# Altium PCB Sheet1.PcbDoc
Units mil, origin at the board's own origin, x right, y up, seen from the top; angles counter-clockwise.
Board outline 1260 x 1260 mil, 2 copper layers (Top Layer, Bottom Layer); 21 components, 13 nets, 72 pads, 78 vias.
Unrouted connection lines stored in the file: 24.
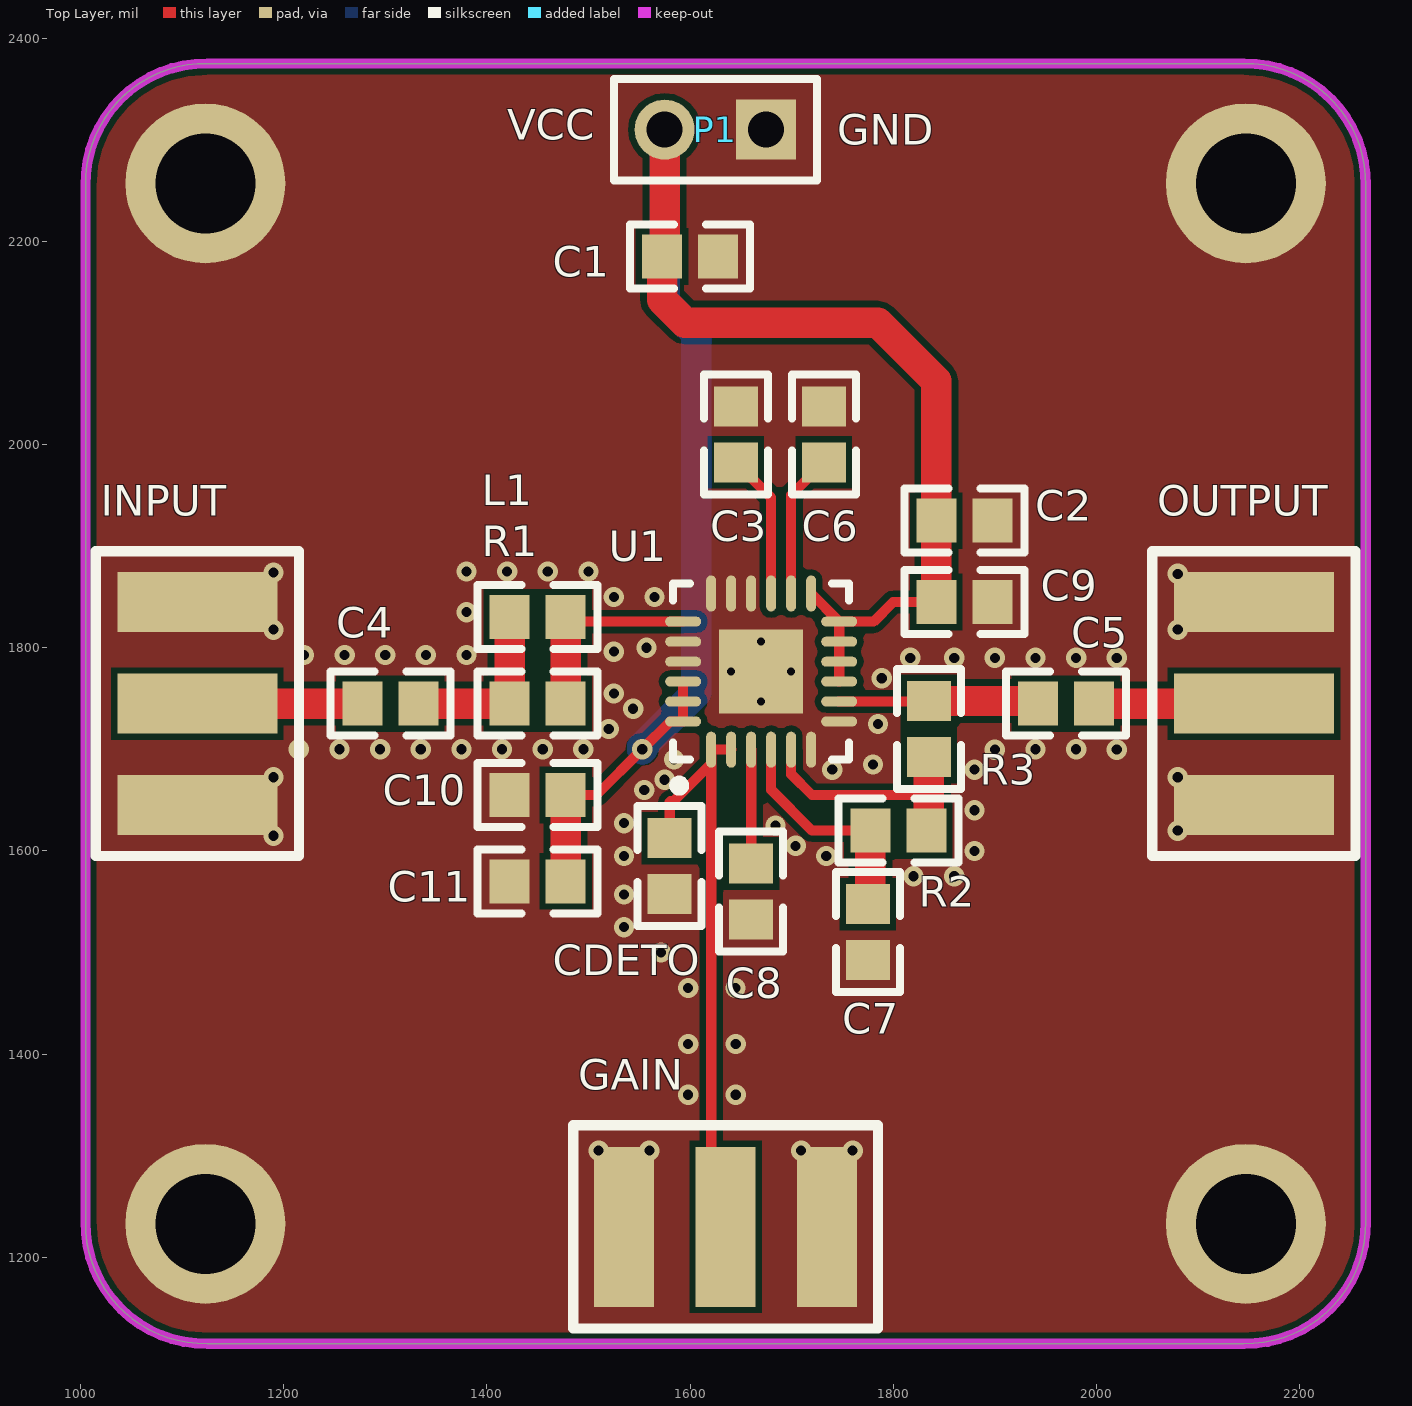
[diagram p0: Top Layer view]
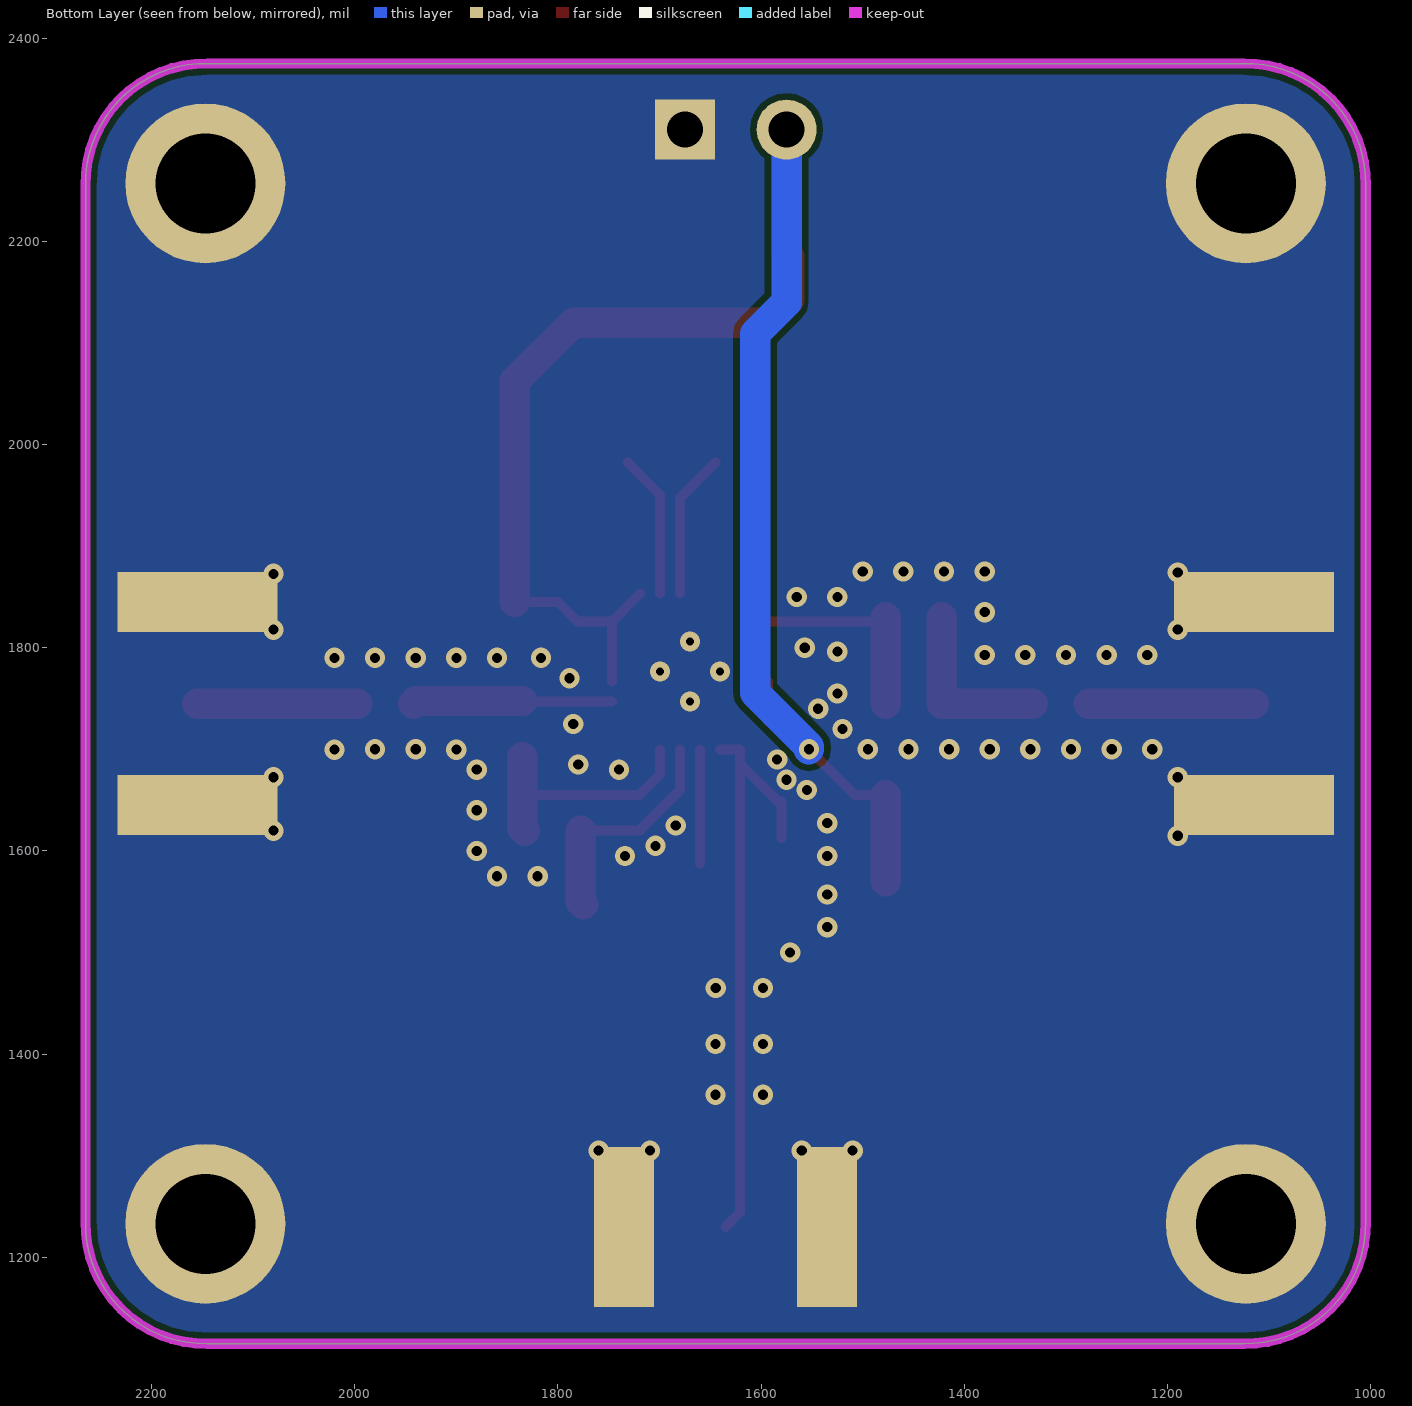
[diagram p1: Bottom Layer view, seen from below]

## Layer stack, top to bottom
Top Solder: solder mask 0.4, Solder Resist, Dk 3.5
Top Layer: signal copper 1.4
Dielectric 1: dielectric 12.6, FR-4, Dk 4.8
Bottom Layer: signal copper 1.4
Bottom Solder: solder mask 0.4, Solder Resist, Dk 3.5

## Board outline
1125,1115 cw(c1123,1233) 1005,1235 1005,2255 cw(c1123,2257) 1125,2375 2145,2375 cw(c2147,2257) 2265,2255 2265,1235 cw(c2147,1233) 2145,1115

## Design rules (kind name [scope] priority, off if disabled: settings)
Clearance [All] p1: gap=6 ignorepadtopadclearanceinfootprint=FALSE
ComponentClearance [All] p1: gap=0 collisioncheckmode=3 verticalgap=0 showdistances=FALSE
PolygonConnect [All] p1: connectstyle=Direct reliefconductorwidth=10 reliefentries=4 polygonreliefangle="45 Angle" airgapwidth=10
RoutingVias [All] p1: holewidth=10 width=20 viastyle="Through Hole" minholewidth=10 minwidth=20 maxholewidth=10 maxwidth=20
SolderMaskExpansion [All] p1: expansion=4
Width [All] p1: maxlimit=30 minlimit=10 preferedwidth=30
29 further rules are at their usual default settings.

## Components (designator, comment, footprint, x,y, rotation, side; value= is the part's Value field where it differs from the comment)
C1 "22uF" 0603 1600,2185 r180 top
C2 "100nF" 0603 1870,1925 r180 top
C3 "?nF" 0603 1645,2010 r270 top
C4 "10nF" 0603 1305,1745 r180 top
C5 "10nF" 0603 1970,1745 r0 top
C6 "?nF" 0603 1731.61,2010 r270 top
C7 "?nF" 0603 1775,1520 r270 top
C8 "10nF" 0603 1660.2,1560 r270 top
C9 "1nF" 0603 1870,1845 r180 top
C10 "100nF" 0603 1450,1655 r0 top
C11 "1nF" 0603 1450,1570 r0 top
CDETO ">1nF" 0603 1580,1585 r270 top
GAIN "OUTPUT" SMA-2 1635,1230 r180 top (schematic designator RSSI)
INPUT "INPUT" SMA-2 1115,1745 r90 top
L1 "10nH" 0603 1450,1830 r0 top
OUTPUT "OUTPUT" SMA-2 2155,1745 r90 top
P1 "Header 2" HDR1X2 1675,2310 r180 top
R1 "215Ω" 0603 1450,1745 r0 top
R2 "100Ω" 0603 1805,1620 r180 top
R3 "1KΩ" 0603 1835,1720 r270 top
U1 "AD8368ACPZ" LFCSP-24_4X4X05P 1673.2,1777.3 r90 top

## Footprints (in the part's own frame and the unit in brackets; to place one, negate y for a bottom-side part, rotate by r counter-clockwise, add the part's x,y. Pads: shape width x height; smd on the part's side, far side on the other; paste and mask are expansions set on the pad)
0603 [mm]
  rect 1x1.1 smd: 1(-0.7,0) 2(0.7,0)
  silkscreen extent -1.5,-0.8 1.5,0.8
HDR1X2 [mm] "Connector; Header; 2 Position"
  rect 1.5x1.5 hole 0.9: 1(0,0)
  round 1.5 hole 0.9: 2(2.54,0)
  silkscreen extent -1.27,-1.27 3.81,1.27
LFCSP-24_4X4X05P [mm]
  oval 0.9x0.25 smd: 1(-1.971,1.331) 2(-1.971,0.831) 3(-1.971,0.33) 4(-1.971,-0.168) 5(-1.971,-0.668) 6(-1.971,-1.168) 13(1.93,-1.168) 14(1.93,-0.668) 15(1.93,-0.168) 16(1.93,0.33) 17(1.93,0.831) 18(1.93,1.331)
  oval 0.25x0.9 smd: 7(-1.27,-1.869) 8(-0.77,-1.869) 9(-0.269,-1.869) 10(0.229,-1.869) 11(0.729,-1.869) 12(1.229,-1.869) 19(1.229,2.032) 20(0.729,2.032) 21(0.229,2.032) 22(-0.269,2.032) 23(-0.77,2.032) 24(-1.27,2.032)
  rect 2.1x2.1 smd: 25(-0.02,0.081)
  silkscreen extent -3,-2.12 2.18,2.28
SMA-2 [mm]
  rect 1.5x4 smd: 1(0,0)
  rect 1.5x4 all layers, no hole: 2(2.54,0) 3(-2.54,0)
  silkscreen extent -3.81,-2.54 3.81,2.54

## Part data
C1 C2 C3 C4 C5 C6 C7 C8 C9 C10 C11 CDETO: library part C, BOM_Manufacturer=YAGEO, BOM_Manufacturer Part=CC0603KRX7R7BB104, BOM_Supplier=LCSC, BOM_Supplier Part=C108079, Contributor=LCSC, nameAlias=Capacitance, spicePre=C, spiceSymbolName=CC0603KRX7R7BB104
GAIN INPUT OUTPUT: library part SMA
L1 R1 R2 R3: library part R, BOM_Manufacturer=UniOhm, BOM_Manufacturer Part=TC0350D1002T5E, BOM_Supplier=LCSC, BOM_Supplier Part=C64266, nameAlias=Value, spicePre=R, spiceSymbolName=TC0350D1002T5E
P1: "Header, 2-Pin", LatestRevisionDate=17-Jul-2002, LatestRevisionNote="Re-released for DXP Platform.", Publisher="Altium Limited"
U1: library part AD8368

## Free pads (board coordinates)
  round 157.48 hole 98.42: 2(1123,2257) 3(2147,2257) 4(2147,1233) 5(1123,1233)

## Via types
v1: diameter 20, hole 10, Top Layer to Bottom Layer, 74 vias
v2: diameter 19.68, hole 7.87, Top Layer to Bottom Layer, 4 vias

## Nets (pads, with @x,y where several pads share a name; then routed paths per layer and width w, separated by ;. In a path a pad name is that pad's centre, name@x,y a point inside that pad or via, vN(x,y) a via of type N, cw(c..) or ccw(c..) an arc to the next point about the centre after c; other vN are vias at no path point)
GAIN: CDETO.1 GAIN.1 U1.1 U1.2 | length 589.9
  Top Layer w10: CDETO.1 1580,1647.92 1581.08,1649 1583.7,1649 1620.8,1686.1 U1.1@1620.8,1688.72 ; GAIN.1 1620.8,1244.2 U1.1@1620.8,1688.72 ; U1.2 U1.1 U1.1@1620.8,1688.72
GND: C1.1 C2.1 C3.1 C6.1 C7.2 C8.2 C9.1 C10.1 C11.1 CDETO.2 GAIN.2 GAIN.3 INPUT.2 INPUT.3 OUTPUT.2 OUTPUT.3 P1.1 pad.2 pad.3 pad.4 pad.5 U1.6 U1.7 U1.16 U1.17 U1.18 U1.20 U1.21 U1.25
  other v1: 1510,1305 1560,1305 1709.35,1305 1760,1305 1598.12,1360 1645,1360 1598.12,1410 1645,1410 1598.12,1465 1644.76,1465 1571.48,1500 1535,1525 1535,1557.09 1820,1575 1860,1575 1535,1595 1734.01,1595 1880,1600 1703.96,1605 1190,1615 2080,1620 1684.06,1625 1535,1627.35 1880,1640 1555,1660 1575,1670 1190,1672.44 2080,1672.44 1740,1680 1880,1680 1780,1685 1584.27,1690 1215,1700.1 1255,1700.1 1295,1700.1 1335,1700.1 1375,1700.1 1415,1700.1 1455,1700 1495,1700.1 1900,1699.7 1940,1700 1980,1700.1 2020,1699.7 1520,1720 1785,1725 1543.97,1740 1525,1754.87 1788.63,1770 1816.76,1790 1860,1790 1900,1790 1940,1790 1980,1790 2020,1790 1220,1792.75 1260,1792.75 1300,1792.75 1340,1792.75 1380,1792.75 1525,1796.15 1557.08,1800 1190,1817.77 2080,1817.83 1380,1835 1525,1850 1565,1850 2080,1872.65 1190,1873.97 1380,1875 1420,1875 1460,1875 1500,1875
  other v2: 1670,1747 1640.5,1776.5 1699.5,1776.5 1670,1806
IND: L1.2 R1.2 U1.19 | length 202.4
  Top Layer w10: L1.2 1481.86,1825.7 U1.19
  Top Layer w30: R1.2 L1.2
NetC3_2: C3.2 U1.15 | length 143.6
  Top Layer w10: C3.2 1679.8,1947.64 U1.15
NetC4_1: C4.1 L1.1 R1.1 | length 174.9
  Top Layer w30: C4.1 R1.1 L1.1
NetC4_2: C4.2 INPUT.1 | length 162.4
  Top Layer w30: INPUT.1 C4.2
NetC5_2: C5.2 OUTPUT.1 | length 157.4
  Top Layer w30: C5.2 OUTPUT.1
NetC6_2: C6.2 U1.14 | length 142.4
  Top Layer w10: U1.14 1699.5,1950.33 C6.2
NetC7_1: C7.1 R2.2 U1.4 | length 227.2
  Top Layer w10: U1.4 1679.8,1660.2 1720,1620 R2.2
  Top Layer w30: C7.1 1777.44,1550 R2.2
NetC8_1: C8.1 U1.3 | length 112.1
  Top Layer w10: C8.1 U1.3
NetR2_1: R2.1 R3.2 U1.5 | length 241.6
  Top Layer w10: U1.5 1699.5,1675.5 1720,1655 1835,1655
  Top Layer w30: R2.1 1835,1622.44 1835,1655 R3.2
OUTD: C5.1 R3.1 U1.8 | length 196.9
  Top Layer w10: U1.8 1834.44,1747 R3.1
  Top Layer w30: R3.1 1939.88,1747.56 C5.1
VCC: C1.2 C2.2 C9.2 C10.2 C11.2 P1.2 U1.9 U1.10 U1.11 U1.12 U1.13 U1.22 U1.23 U1.24 | length 1805.7
  Top Layer w10: C10.2 1507.93,1655 v1(1552.93,1700) 1580.23,1727.3 U1.24 U1.23 U1.22 ; U1.13 U1.12 ; U1.9 U1.10 U1.11 U1.12 ; C9.2 1800,1845 1780.7,1825.7 U1.12
  Top Layer w30: C11.2 C10.2 ; P1.2 1575,2187.56 C1.2 1572.44,2142.56 1595,2120 1785,2120 1842.44,2062.56 C2.2 C9.2
  Bottom Layer w30: v1(1552.93,1700) 1552.93,1702.5 1606.03,1755.6 1606.03,2108.97 1575,2140 P1.2

## Polygon pours and split planes (outlines as drawn)
GND on Top Layer "GND_L01_P000" (solid, pour order 0): 1125,1115 cw(c1123,1233) 1005,1235 1005,2255 cw(c1123,2257) 1125,2375 2145,2375 cw(c2147,2257) 2265,2255 2265,1235 cw(c2147,1233) 2145,1115
GND on Bottom Layer "GND_L02_P001" (solid, pour order 1): 1125,1115 cw(c1123,1233) 1005,1235 1005,2255 cw(c1123,2257) 1125,2375 2145,2375 cw(c2147,2257) 2265,2255 2265,1235 cw(c2147,1233) 2145,1115

## Keep-outs
Keep-Out Layer:
  the board outline again, w10

## Silkscreen, mask and mechanical layers (free items; w line width, h text height)
Top Overlay:
  text "VCC" at 1420,2300 h30
  text "GND" at 1745,2295 h30